# Altium PCB PCB1.PcbDoc
Units mil, origin at the board's own origin, x right, y up, seen from the top; angles counter-clockwise.
Board outline 2559.06 x 1181.1 mil, 2 copper layers (Top Layer, Bottom Layer), stack 60.4 mil thick; 1 components, 3 nets, 47 pads, 0 vias.
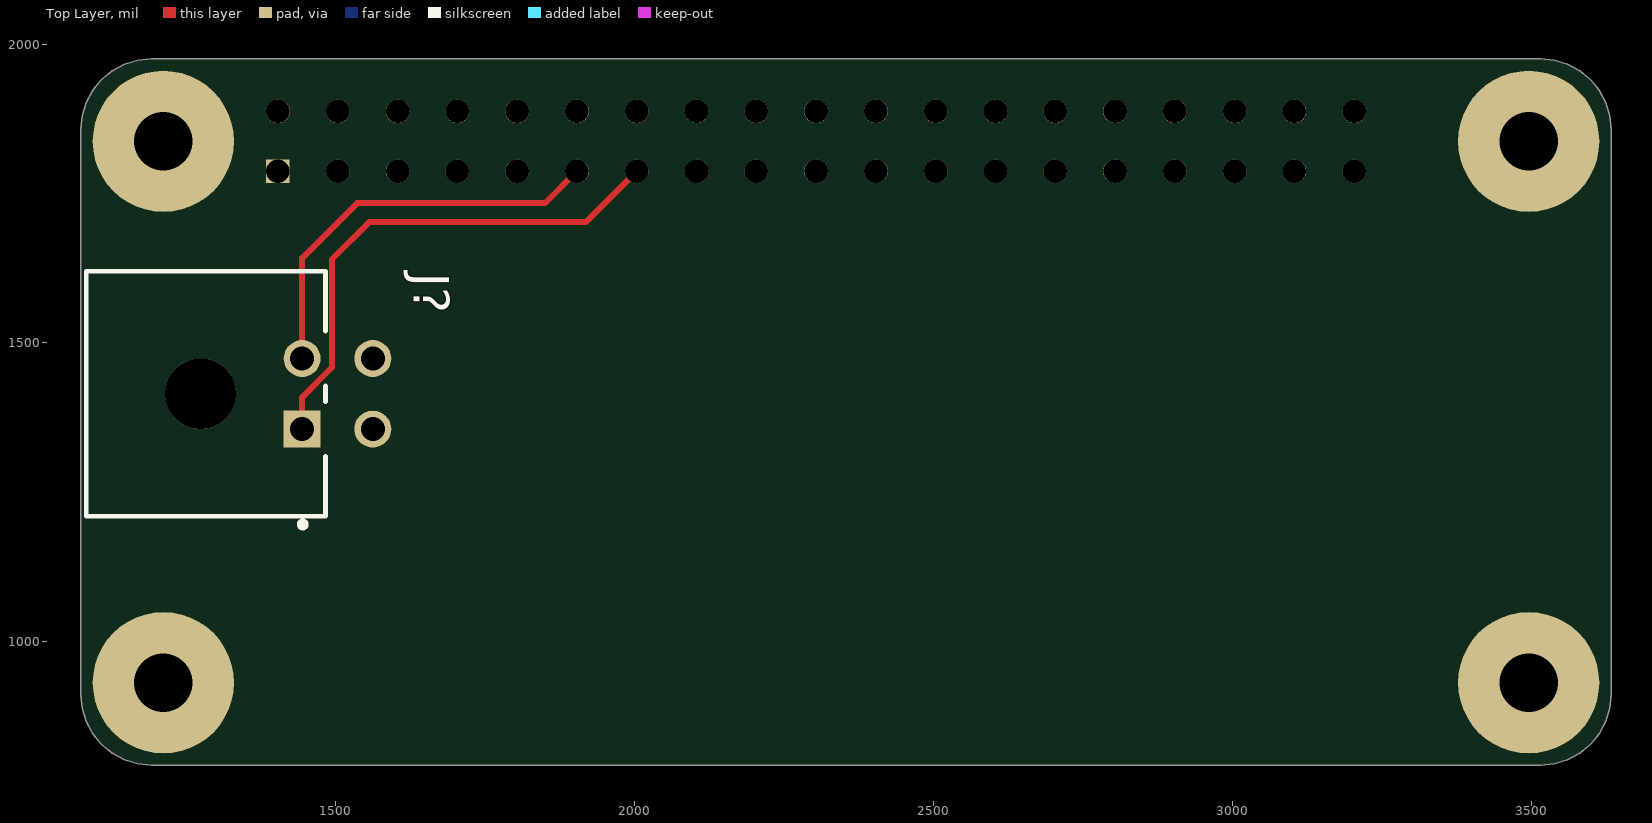
[diagram p0: Top Layer view]
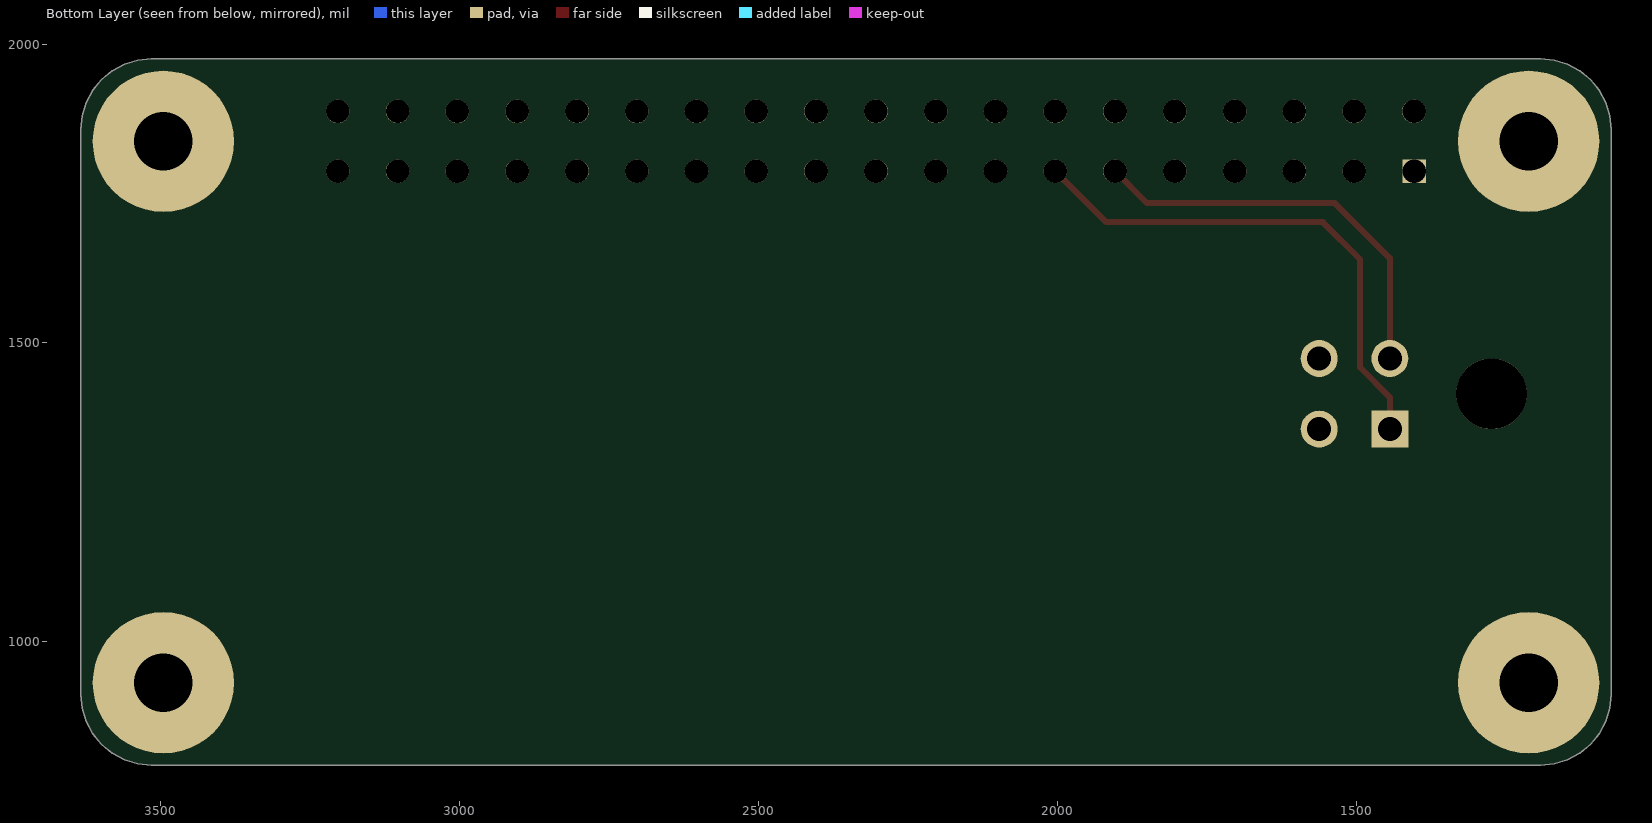
[diagram p1: Bottom Layer view, seen from below]

## Layer stack, top to bottom
Top Solder: solder mask 0.5, Solder Resist, Dk 3.3
Top Layer: signal copper 0.7
Dielectric1: core 59, FR-4, Dk 4.3
Bottom Layer: signal copper 0.7
Bottom Solder: solder mask 0.5, Solder Resist, Dk 3.3

## Board outline
3514.95,794 3537.99,796.27 3560.14,802.99 3580.56,813.91 3598.46,828.59 3613.15,846.49 3624.06,866.91 3630.79,889.07 3633.06,912.11 3633.06,1856.99 3630.79,1880.03 3624.06,1902.19 3613.15,1922.61 3598.46,1940.51 3580.56,1955.2 3560.14,1966.11 3537.99,1972.83 3514.95,1975.1 1192.11,1975.1 1169.07,1972.83 1146.91,1966.11 1126.49,1955.2 1108.59,1940.51 1093.91,1922.61 1082.99,1902.19 1076.27,1880.03 1074,1856.99 1074,912.11 1076.27,889.07 1082.99,866.91 1093.91,846.49 1108.59,828.59 1126.49,813.91 1146.91,802.99 1169.07,796.27 1192.11,794

## Design rules (kind name [scope] priority, off if disabled: settings)
Clearance [All] p1: gap=10 ignorepadtopadclearanceinfootprint=FALSE
DiffPairsRouting [All] p1: maxlimit=10 minlimit=10 mostfreqgap=10 toplayer_minwidth=10 toplayer_maxwidth=10 toplayer_prefwidth=10 bottomlayer_minwidth=10 bottomlayer_maxwidth=10 bottomlayer_prefwidth=10 maxuncoupledlength=500
HoleSize [All] p1: absolutevalues=TRUE maxlimit=300 minlimit=10 maxpercent=80.000 minpercent=20.000
MinimumAnnularRing [All] p1: minimumring=10
PasteMaskExpansion [All] p1: expansion=10
PlaneClearance [All] p1: clearance=15
PlaneConnect [All] p1: pad.planeconnectstyle=Relief pad.reliefexpansion=20 pad.reliefentries=4 pad.reliefconductorwidth=10 pad.reliefairgap=10 via.planeconnectstyle=Direct via.reliefexpansion=20 via.reliefentries=4 via.reliefconductorwidth=10 via.reliefairgap=10
PolygonConnect [All] p1: thpad.connectstyle=Relief thpad.reliefconductorwidth=10 thpad.reliefentries=4 thpad.polygonreliefangle="90 Angle" thpad.airgapwidth=10 smdpad.connectstyle=Relief smdpad.reliefconductorwidth=10 smdpad.reliefentries=4 smdpad.polygonreliefangle="90 Angle" smdpad.airgapwidth=10 via.connectstyle=Direct via.reliefconductorwidth=10 via.reliefentries=4 via.polygonreliefangle="90 Angle" via.airgapwidth=10
RoomDefinition Project1 [InComponentClass('Project1')] p1: confinementstyle=ConfineIn formatcopy=TRUE lockcomponents=FALSE outline 850,727 2242,727 2242,2013 850,2013
RoutingVias [All] p1: holewidth=10 width=20 viastyle="Through Hole" minholewidth=10 minwidth=20 maxholewidth=10 maxwidth=20
SMDNeckDown [All] p1: percent=100.000
SilkToSolderMaskClearance SilkscreenOverComponentPads [IsPad] p1: minsilkscreentomaskgap=10 clearancetoexposedcopper=TRUE
SolderMaskExpansion [All] p1: expansion=10 istentingtop=FALSE
Width [All] p1: maxlimit=10 minlimit=10 preferedwidth=10
24 further rules are at their usual default settings.

## Components (designator, comment, footprint, x,y, rotation, side; value= is the part's Value field where it differs from the comment)
J? "43045-0400" FP-43045-0400-MFG 1287.9,1415.06 r270 top

## Footprints (in the part's own frame and the unit in brackets; to place one, negate y for a bottom-side part, rotate by r counter-clockwise, add the part's x,y. Pads: shape width x height; smd on the part's side, far side on the other; paste and mask are expansions set on the pad)
FP-43045-0400-MFG [mm]
  rect 1.57x1.57 hole 1.02 paste-1000 mask+0: 1(1.5,3.965)
  round 1.57 hole 1.02 paste-1000 mask+0: 2(-1.5,3.965) 3(1.5,6.965) 4(-1.5,6.965)
  round 3 hole 3 unplated paste-1000 mask+0: ""(0,-0.355)
  silkscreen extent -5.2,-5.21 5.67,4.95, body extent -5.3,-5.31 5.3,7.85, height 0.25

## Part data
J?: library part CMP-04776-000002-1, "CONN HEADER R/A 4POS 3MM", Current Rating=8.5A, Manufacturer=Molex, Temperature="-40°C to +105°C", Temperature Range High=+105°C, Temperature Range Low=-40°C, Voltage Rating=600V, Automotive=No, Category=Conn, ComponentLink2Description=Datasheet, ComponentLink2URL=https://www.molex.com/webdocs/datasheets/pdf/en-us/0430450400_PCB_HEADERS.pdf, Conn Gender=Male, Conn Orientation="Right Angle", Contact Material=Tin,Nickel, Device Class L1=Connectors, Device Class L2="Headers and Wire Housings", Device Class L3=unset, Digikey Description="CONN HEADER R/A 4POS 3MM", Footprint Url=https://www.molex.com/pdm_docs/sd/430450400_sd.pdf, Height=9.27mm, Is Female=yes, Lead Free=Yes, Manufacturer Part Number=43045-0400, Number Of Contacts=4, Number Of Rows=2, Octopart=https://octopart.com/43045-0400-molex-287063, Package=43045-0400, Pitch=3mm, RoHS=TRUE

## Free pads (board coordinates)
  round 236.22 hole 98.43: 1(1211.8,931.8) 1(1211.8,1837.31) 1(3495.26,931.8) 1(3495.26,1837.31)
  rect 39.37x39.37 hole 39.37: 1(1403.53,1787.31)
  round 39.37 hole 39.37: 1(1403.53,1887.31) 1(1503.53,1787.31) 1(1503.53,1887.31) 1(1603.53,1787.31) 1(1603.53,1887.31) 1(1703.53,1787.31) 1(1703.53,1887.31) 1(1803.53,1787.31) 1(1803.53,1887.31) 1(1903.53,1787.31) 1(1903.53,1887.31) 1(2003.53,1787.31) 1(2003.53,1887.31) 1(2103.53,1787.31) 1(2103.53,1887.31) 1(2203.53,1787.31) 1(2203.53,1887.31) 1(2303.53,1787.31) 1(2303.53,1887.31) 1(2403.53,1787.31) 1(2403.53,1887.31) 1(2503.53,1787.31) 1(2503.53,1887.31) 1(2603.53,1787.31) 1(2603.53,1887.31) 1(2703.53,1787.31) 1(2703.53,1887.31) 1(2803.53,1787.31) 1(2803.53,1887.31) 1(2903.53,1787.31) 1(2903.53,1887.31) 1(3003.53,1787.31) 1(3003.53,1887.31) 1(3103.53,1787.31) 1(3103.53,1887.31) 1(3203.53,1787.31) 1(3203.53,1887.31)

## Nets (pads, with @x,y where several pads share a name; then routed paths per layer and width w, separated by ;. In a path a pad name is that pad's centre, name@x,y a point inside that pad or via, vN(x,y) a via of type N, cw(c..) or ccw(c..) an arc to the next point about the centre after c; other vN are vias at no path point)
GND: J?.4
NetJ?_1: J?.1 pad.1@2003.53,1787.31 | length 875.3
  Top Layer w10: J?.1 1444,1409.19 1494,1459.19 1494,1640 1556,1702 1918.22,1702 pad.1@2003.53,1787.31
NetJ?_2: J?.2 pad.1@1903.53,1787.31 | length 687.6
  Top Layer w10: J?.2 1444,1642 1536,1734 1850.22,1734 pad.1@1903.53,1787.31
pads on no net: J?. J?.3